# EAGLE board Left_Side_Moror (EAGLE 9.7.0)
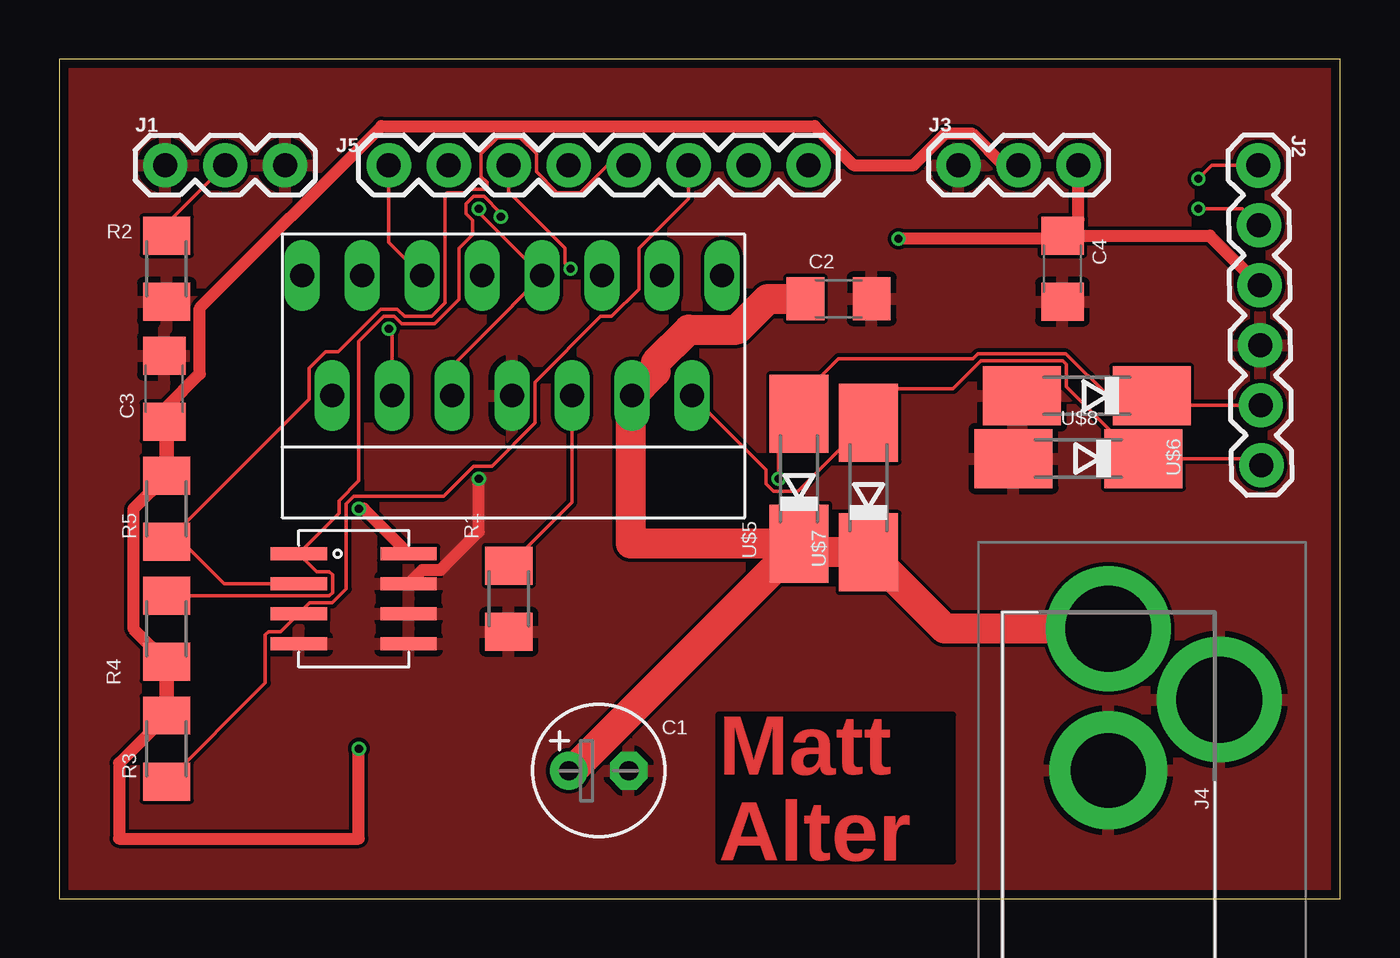
[diagram p0: board, top side]
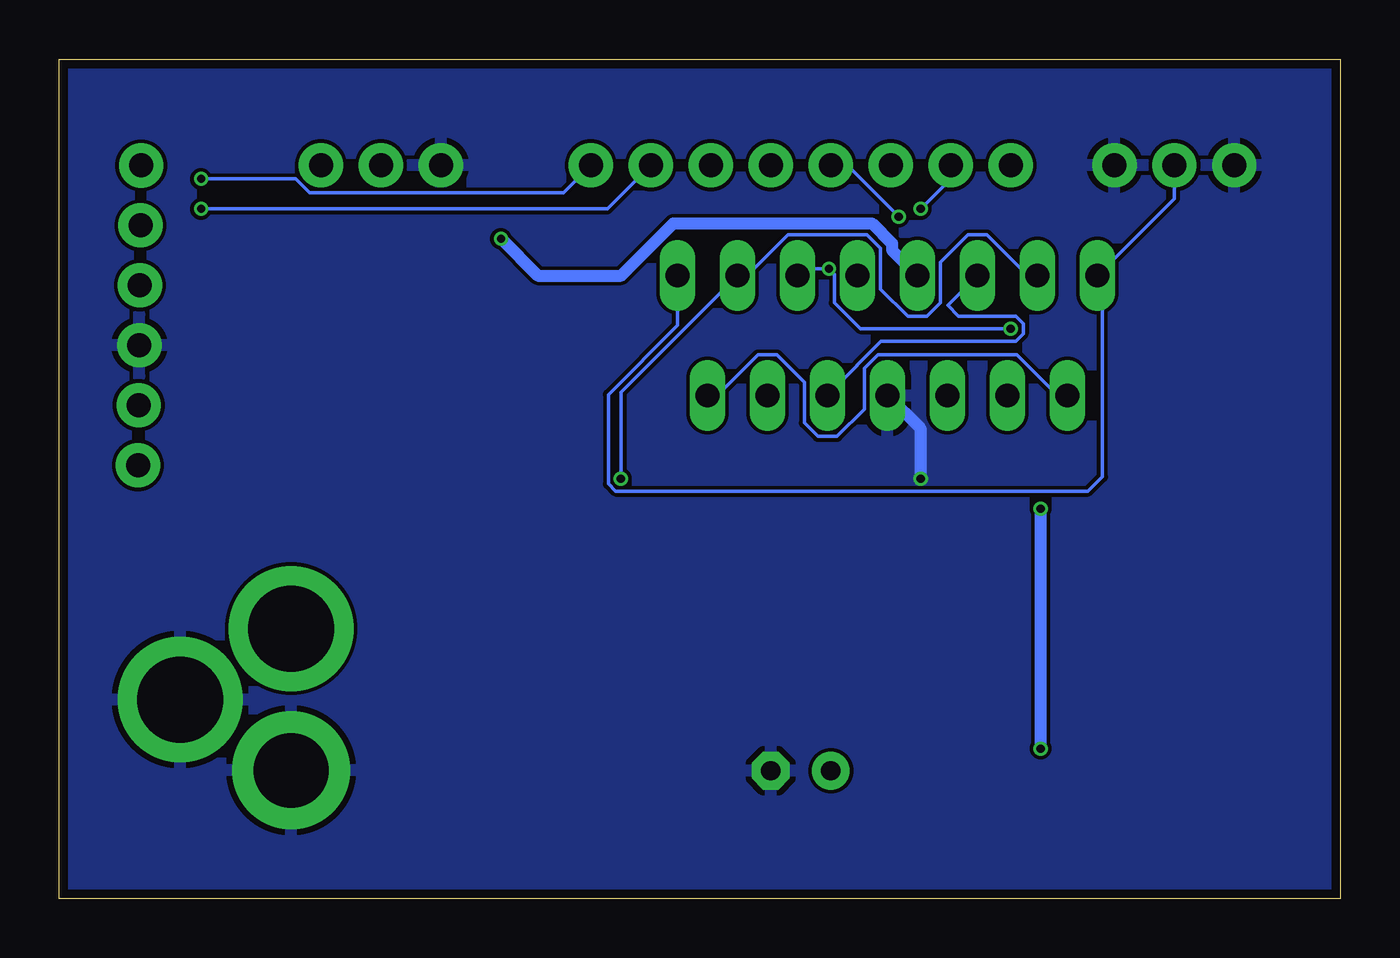
[diagram p1: board, bottom side, seen from below]

Size 54.28 x 35.55 mm. Coordinates in mm from the lower left corner, seen from the top.
Outline: 0,0 54.28,0 54.28,35.55 0,35.55 0,0
Copper layers (1*16): Top 0.035559375mm / dielectric 1.6mm / Bottom 0.035559375mm
Design rules "oshpark-2layer": minimum track width 6mil, minimum drill 10mil, track to track 6mil, track to pad 6mil, pad to pad 6mil, via to via 6mil, smd to smd 6mil, copper to edge 15mil, drill to drill 6mil, minimum pad ring 5mil, minimum via ring 5mil, stop-mask expansion 2.5mil, vias tented up to drill 0mil, thermal gap 10mil

## Footprints (pad centres in the part's own frame; a part is rotated, then mirrored left to right if it is on the bottom)
E2,5-6 = drill 0.813 pad 1.6: + -1.27,0 | drill 0.813 pad 1.6 octagon: - 1.27,0
C1206 = smd 1.6 x 1.8: 1 -1.4,0; 2 1.4,0
1X03 = drill 1.016 pad 1.88: 1 0,0; 2 2.54,0; 3 5.08,0
1X06 = drill 1.016 pad 1.88: 1 0,0; 2 2.54,0; 3 5.08,0; 4 7.62,0; 5 10.16,0; 6 12.7,0
CONSOCJ2155 = drill 3.64 pad 5.3: 1 0,0; 3 -3,-4.7 | drill 3.162 pad 5: 2 -6,0
1X08 = drill 1.016 pad 1.88: 1 0,0; 2 2.54,0; 3 5.08,0; 4 7.62,0; 5 10.16,0; 6 12.7,0; 7 15.24,0; 8 17.78,0
M1206 = smd 1.6 x 2: 1 -1.4,0; 2 1.4,0
L298N-MULTIWATT15 = drill 1 pad 1.2 long: 1 9.03,2.25; 2 7.76,-2.83; 3 6.49,2.25; 4 5.22,-2.83; 5 3.95,2.25; 6 2.68,-2.83; 7 1.41,2.25; 8 0.14,-2.83; 9 -1.13,2.25; 10 -2.4,-2.83; 11 -3.67,2.25; 12 -4.94,-2.83; 13 -6.21,2.25; 14 -7.48,-2.83; 15 -8.75,2.25
SOIC-8 = smd 2.388 x 0.559: 1 -2.54,1.905; 2 -2.54,0.635; 3 -2.54,-0.635; 4 -2.54,-1.905; 5 2.108,-1.905; 6 2.108,-0.635; 7 2.108,0.635; 8 2.108,1.905
SOD106A-W = smd 3.303 x 2.5: A 2.75,0; C -2.75,0

## Placement (x,y rotation side)
C1  1uF  [E2,5-6]  22.86,5.42 0 top
C2  100nF  [C1206]  33.02,25.4 0 top
C3  100nF  [C1206]  4.46,21.59 90 top
C4  100nF  [C1206]  42.5,26.67 270 top
J1  [1X03]  4.5,31.05 0 top
J2  MTR_CTRL  [1X06]  50.8,31.05 270.6 top
J3  MCU PWR  [1X03]  38.1,31.05 0 top
J4  CON-SOCJ-2155  [CONSOCJ2155]  44.45,11.43 90 top
J5  [1X08]  31.75,31.05 180 top
R1  10K  [M1206]  19.05,12.7 90 top
R2  0.04  [M1206]  4.56,26.67 270 top
R3  10K  [M1206]  4.56,6.35 90 top
R4  10K  [M1206]  4.56,11.43 270 top
R5  10K  [M1206]  4.56,16.51 90 top
U$1  L298N-MULTIWATT15  [L298N-MULTIWATT15]  19.05,24.13 0 top
U$2  LM75A-SOIC8  [SOIC-8]  12.7,12.7 0 top
U$5  SS14CT-ND  [SOD106A-W]  31.35,17.78 90 top
U$6  SS14CT-ND  [SOD106A-W]  43.54,21.29 180 top
U$7  SS14CT-ND  [SOD106A-W]  34.29,17.41 90 top
U$8  SS14CT-ND  [SOD106A-W]  43.18,18.63 180 top

## Library data of the parts
C1-C4 = rcl; SPICEPREFIX: C
J1 J3 = SparkFun-Connectors
J2 = SparkFun-Connectors; PROD_ID: CONN-08437
J4 = SamacSys_Parts; DESCRIPTION: DC Power Connectors Power Jack/Connector 2.1mm x 5.5mm; HEIGHT: 11mm; MANUFACTURER_NAME: Gravitech; MANUFACTURER_PART_NUMBER: CON-SOCJ-2155; MOUSER_PART_NUMBER: 992-CON-SOCJ-2155; MOUSER_PRICE-STOCK: https://www.mouser.co.uk/ProductDetail/Gravitech/CON-SOCJ-2155/?qs=fkzBJ5HM%252BdCcpvFQyQZHtA%3D%3D
J5 = SparkFun-Connectors; PROD_ID: CONN-08438
R1-R5 = rcl; SPICEPREFIX: R
U$1 = ECE5780-MotorDriver
U$2 U$5-U$8 = L298_Motor_Driver_Lib_ECE5780

## Nets
3.3V: C3.1 J3.2 R3.2 R4.2 R5.2 U$2.8
5V: C4.1 J2.3 J3.3 U$1.9
CS: J1.2 R2.1 U$1.1 U$1.15
ENABLE: J5.8 R1.2 U$1.6 U$1.11
ENC_A: J2.2 J5.2
ENC_B: J2.1 J5.1
GND: C1.- C2.2 C3.2 C4.2 J1.1 J1.3 J2.4 J3.1 J4.2 J4.3 R1.1 R2.2 U$1.8 U$2.4 U$2.5 U$2.6 U$2.7 U$6.A U$8.A
IN_1: J5.7 U$1.7 U$1.10
IN_2: J5.6 U$1.5 U$1.12
MTR_BLK: J2.5 U$1.3 U$1.13 U$5.A U$6.C
MTR_RED: J2.6 U$1.2 U$1.14 U$7.A U$8.C
O.S.: J5.3 R3.1 U$2.3
SCL: J5.4 R5.1 U$2.2
SDA: J5.5 R4.1 U$2.1
VCC: C1.+ C2.1 J4.1 U$1.4 U$5.C U$7.C

## Tracks (layer width: path | path; a pad name or v marks a point on that pad's centre or on a via)
3.3V  (via drill 0.35)
  Top 0.508: J3.2 40,31.05 38.66,32.4 37.54,32.4 36.2,31.05 33.65,31.05 32,32.7 13.66,32.7 5.96,25.01 5.96,22.22 4.56,20.82 4.56,20.09 | R3.2 2.54,5.73 2.54,2.54 12.7,2.54 v12.7,6.35 | v12.7,16.51 12.9,16.51 U$2.8 | R5.2 3.15,16.5 3.15,11.44 R4.2
  Top 0.61: C3.1 4.56,20.09 R5.2 | R4.2 R3.2
  Bottom 0.508: v12.7,6.35 v12.7,16.51
5V  (via drill 0.35)
  Top 0.508: C4.1 48.75,28.07 J2.3 | C4.1 43.18,28.75 J3.3 | C4.1 42.37,27.94 v35.56,27.94
  Bottom 0.508: v35.56,27.94 34,26.38 30.46,26.38 28.25,28.59 19.86,28.59 19,27.73 19,27.46 U$1.9
CS
  Top 0.152: J1.2 4.56,28.57 R2.1
  Bottom 0.152: U$1.15 10.09,26.59 | 10.09,26.59 7.04,29.64 J1.2 | 10.09,26.59 10.09,17.85 10.69,17.25 30.7,17.25 31.01,17.56 31.01,21.34 28.08,24.27 U$1.1
ENABLE
  Top 0.152: R1.2 21.73,16.78 U$1.6 | U$1.11 13.97,27.79 J5.8
  Bottom 0.152: U$1.6 20.47,22.56 20.47,22.58 19.46,23.6 13.75,23.6 13.44,23.91 13.44,24.35 13.75,24.66 16.17,24.66 16.64,25.12 U$1.11
ENC_A  (via drill 0.35)
  Top 0.152: J2.2 50.13,29.21 v48.26,29.21
  Bottom 0.152: v48.26,29.21 31.05,29.21 J5.2
ENC_B  (via drill 0.35)
  Top 0.152: J2.1 48.83,31.05 v48.26,30.48
  Bottom 0.152: v48.26,30.48 44.26,30.48 43.66,29.89 32.92,29.89 J5.1
GND  (via drill 0.35)
  Top 0.508: U$2.7 15.39,13.92 16.17,13.92 17.78,15.53 v17.78,17.78
  Bottom 0.508: v17.78,17.78 17.78,19.89 U$1.8
  pour Top: 0.25,0.25 54.03,0.25 54.03,35.3 0.25,35.3
  pour Bottom: 0.25,0.25 54.03,0.25 54.03,35.3 0.25,35.3
IN_1  (via drill 0.35)
  Top 0.152: U$1.10 16.65,22.54 19.2,25.1 19.2,25.12 U$1.7 18.5,28.34 18.49,28.34 17.78,29.05 v17.78,29.21
  Bottom 0.152: v17.78,29.21 16.51,30.48 J5.7
IN_2  (via drill 0.35)
  Top 0.152: v21.66,26.67 21.44,26.9 21.44,27.54 19.05,29.92 J5.6 | v13.97,24.13 14.11,23.99 U$1.12
  Bottom 0.152: U$1.5 22.71,26.67 v21.66,26.67 21.44,26.44 21.44,25.23 20.34,24.13 v13.97,24.13
MTR_BLK  (via drill 0.35)
  Top 0.152: J2.5 46.68,20.89 U$6.C 44.44,21.29 42.66,23.07 38.91,23.07 38.7,22.86 33.02,22.86 31.35,21.19 U$5.A 30.48,19.66 v30.48,17.78
  Bottom 0.152: U$1.13 13.25,26.38 14.97,28.11 15.79,28.11 16.94,26.95 16.94,25.23 17.52,24.65 18.32,24.65 19.48,25.81 19.48,27.54 20.05,28.11 23.41,28.11 25.13,26.38 U$1.3 30.48,21.44 v30.48,17.78
MTR_RED
  Top 0.152: J2.6 50.65,18.63 U$8.C 44.76,19.81 44.54,19.81 42.67,21.68 42.67,22.63 42.53,22.76 39.04,22.76 37.86,21.59 34.29,21.59 U$7.A 34.2,20.16 31.29,17.25 30.26,17.25 29.95,17.56 29.95,18.16 U$1.2
  Bottom 0.152: U$1.2 26.4,21.3 24.67,23.03 23.87,23.03 22.71,21.87 22.71,20.15 22.13,19.57 21.32,19.57 20.17,20.73 20.17,22.45 19.59,23.03 13.7,23.03 11.98,21.3 U$1.14
O.S.
  Top 0.152: R3.1 8.74,9.13 8.74,11.17 8.87,11.3 9.4,11.3 U$2.3 10.62,12.52 11.57,12.52 12.17,13.12 12.17,16.73 12.48,17.04 16.29,17.04 17.56,18.31 18.34,18.31 20.17,20.15 20.17,21.87 22.95,24.65 23.41,24.65 24.56,25.81 24.56,27.54 26.67,29.64 J5.3
SCL
  Top 0.152: U$2.2 6.98,13.34 5.08,15.24 4.69,15.24 R5.1 10.59,21.15 10.59,22.45 11.3,23.16 11.82,23.16 13.62,24.96 14.32,24.96 14.63,24.65 15.79,24.65 16.36,25.23 16.36,29.81 16.43,29.89 17.27,29.89 17.43,30.04 18.13,30.04 18.13,30.33 17.88,30.57 17.88,31.54 18.57,32.22 19.53,32.22 20.22,31.54 20.22,30.77 21.11,29.89 22.07,29.89 23.24,31.05 J5.4
SDA  (via drill 0.35)
  Top 0.152: R4.1 8.87,12.83 11.45,12.83 11.58,12.96 11.58,13.71 11.45,13.84 10.92,13.84 U$2.1 11.86,16.31 11.86,16.86 12.7,17.69 12.7,23.61 13.75,24.66 14.19,24.66 14.5,24.35 15.91,24.35 16.94,25.38 16.94,27.54 17.52,28.11 17.52,28.73 17.25,28.99 17.25,29.43 17.56,29.74 18,29.74 18.71,29.03 v18.71,28.87
  Bottom 0.152: J5.5 20.89,31.05 v18.71,28.87
VCC
  Top 1.27: J4.1 37.52,11.43 U$7.C 31.72,14.66 U$5.C | U$5.C 24.23,15.03 24.23,21.26 U$1.4 25.27,22.3 25.27,22.69 26.68,24.09 28.72,24.09 30.02,25.4 C2.1 | U$5.C 21.73,5.42 C1.+

## Text on the board
Top: Matt / Alter